# Altium PCB LCC Resonant Charging Board.PcbDoc
Units mm, origin at the board's own origin, x right, y up, seen from the top; angles counter-clockwise.
Board outline 100.23 x 48.06 mm, 2 copper layers (Top Layer, Bottom Layer); 29 components, 9 nets, 72 pads, 0 vias.
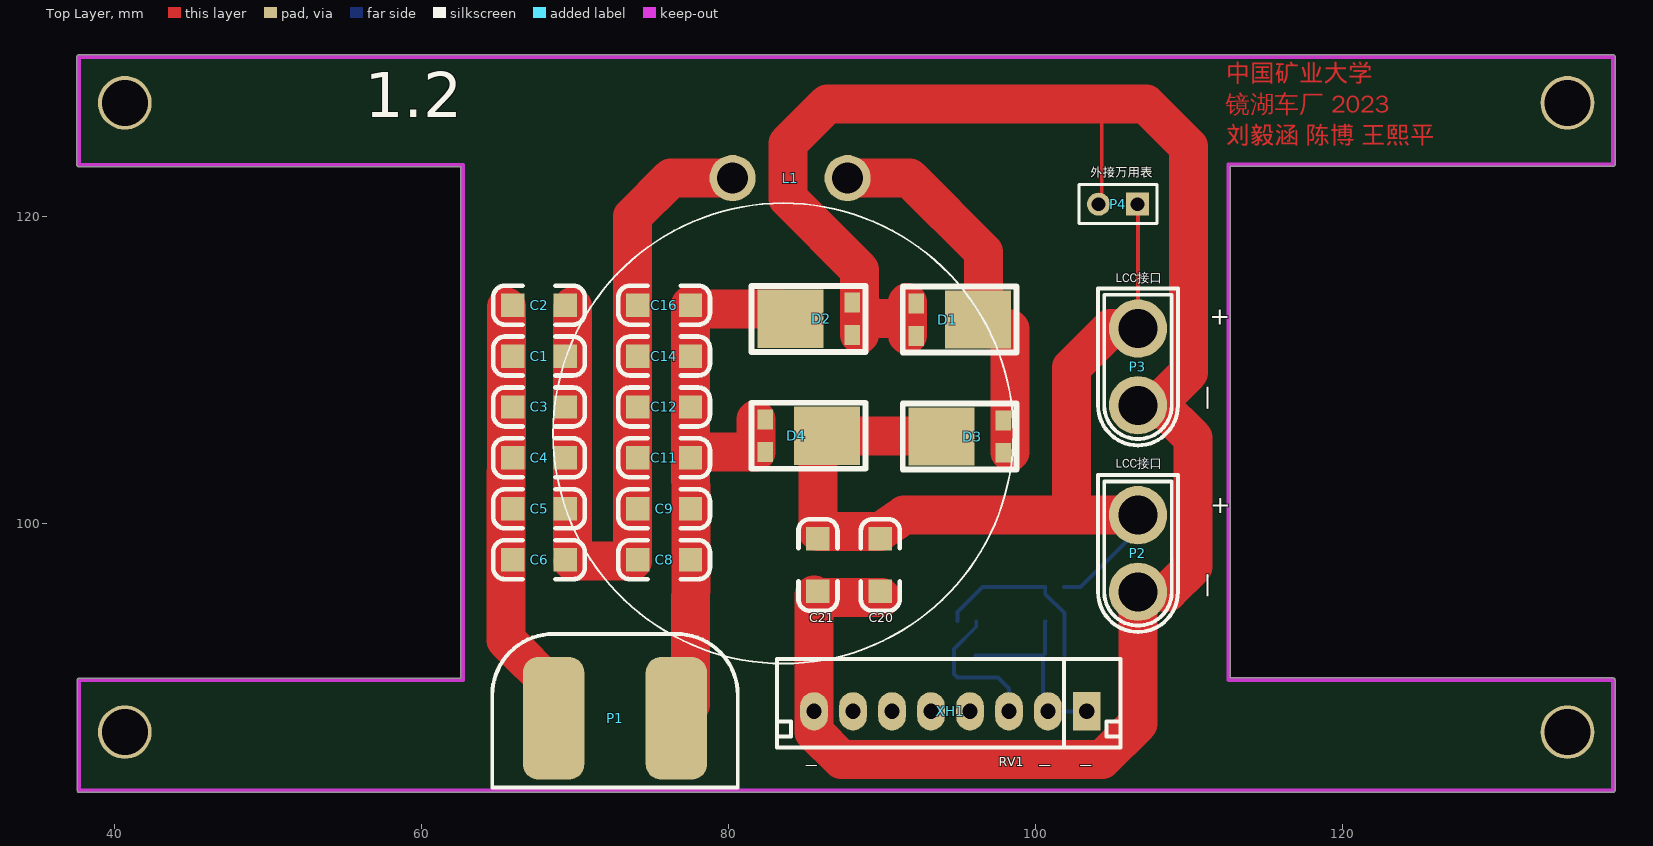
[diagram p0: Top Layer view]
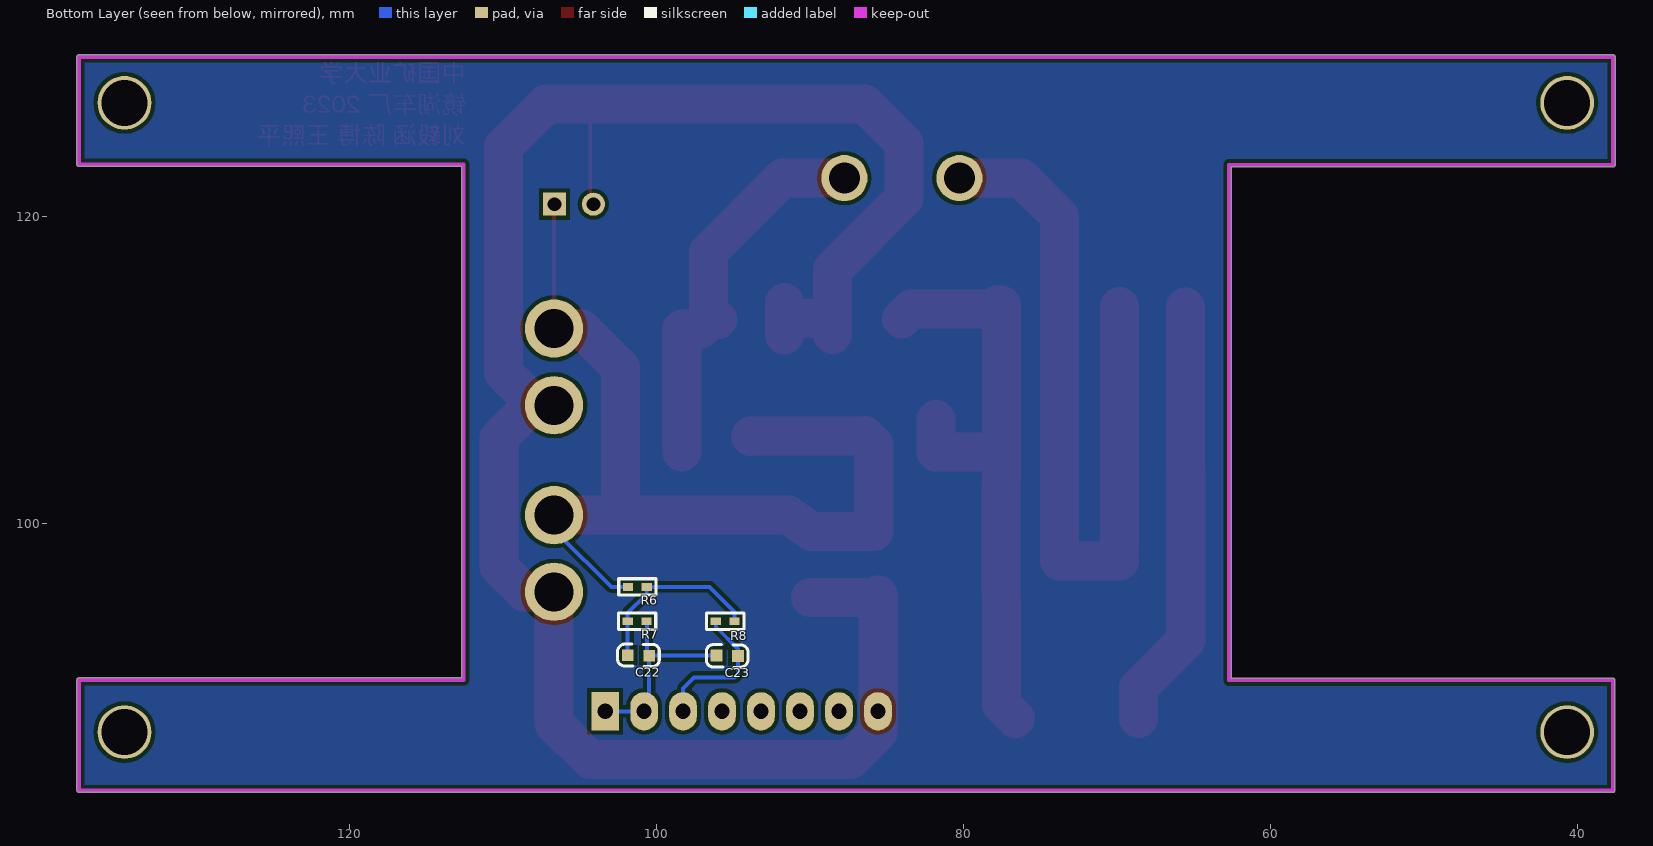
[diagram p1: Bottom Layer view, seen from below]
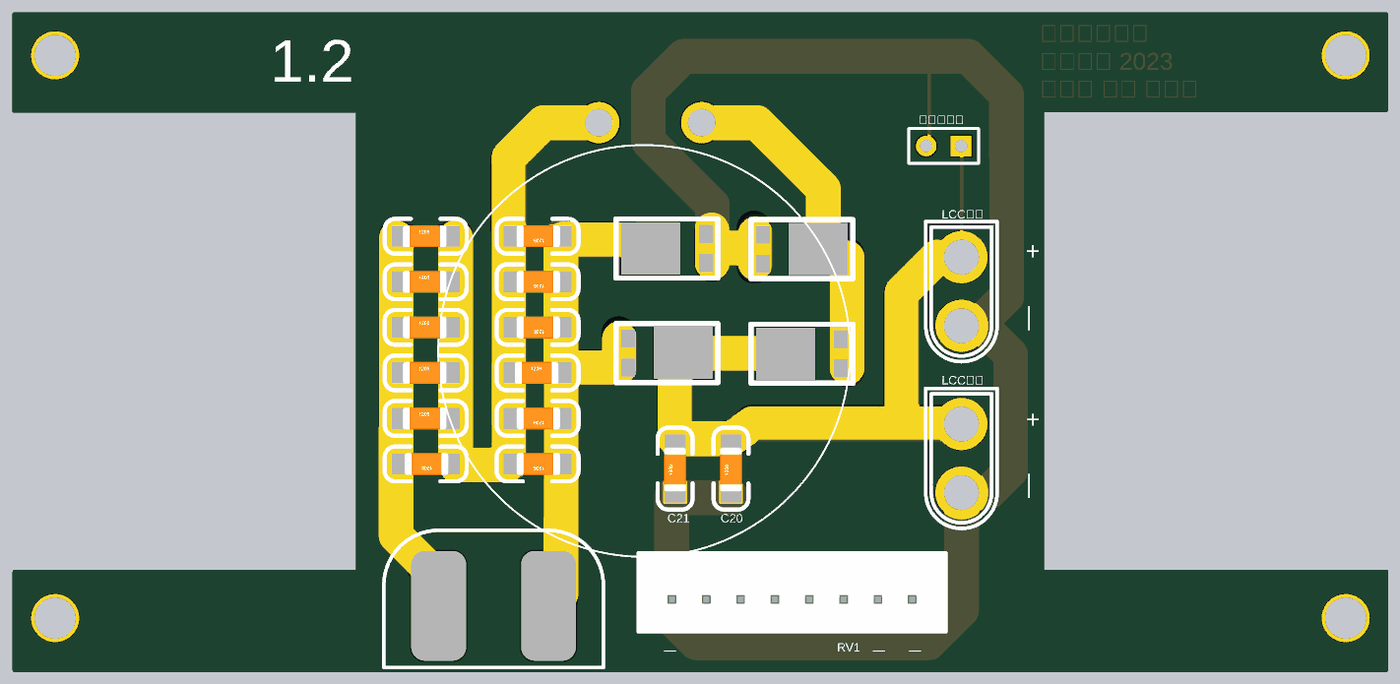
[diagram p2: 3D render of the assembled board from above, using the file's embedded part models]
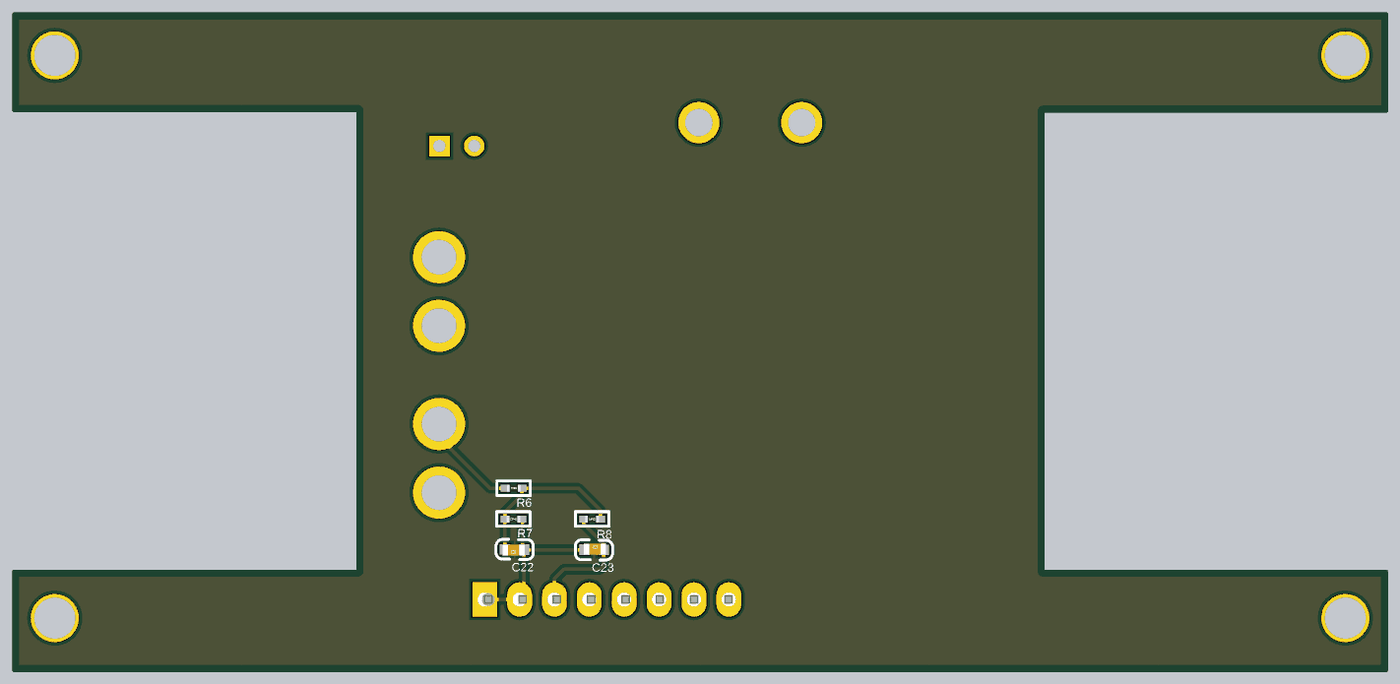
[diagram p3: 3D render of the assembled board from below, using the file's embedded part models]

## Layer stack, top to bottom
Top Solder: solder mask 0.0102, Solder Resist, Dk 3.5
Top Layer: signal copper 0.0356
Dielectric1: dielectric 0.32, FR-4, Dk 4.8
Bottom Layer: signal copper 0.0356
Bottom Solder: solder mask 0.0102, Solder Resist, Dk 3.5

## Board outline
37.719,82.499 cw(c37.719,82.626) 37.592,82.626 37.592,89.814 cw(c37.719,89.814) 37.719,89.942 62.585,89.942 62.585,123.266 37.694,123.266 cw(c37.694,123.393) 37.566,123.393 37.566,130.429 cw(c37.694,130.429) 37.694,130.556 137.668,130.556 cw(c137.668,130.429) 137.758,130.519 cw(c137.668,130.429) 137.795,130.429 137.795,123.429 cw(c137.668,123.429) 137.668,123.302 112.726,123.302 112.726,89.957 137.662,89.957 cw(c137.662,89.829) 137.789,89.829 137.789,82.626 cw(c137.662,82.626) 137.662,82.499

## Design rules (kind name [scope] priority, off if disabled: settings)
Clearance poly [(InPolygon)] p1: gap=0.254 ignorepadtopadclearanceinfootprint=FALSE except(0: Arc-Hole Track-Hole SMDPad-Hole THPad-Hole Via-Hole Fill-Hole Poly-Hole Region-Hole Text-Hole)
Clearance [All] p2: gap=0.127 ignorepadtopadclearanceinfootprint=FALSE except(0: Arc-Hole Track-Hole SMDPad-Hole THPad-Hole Via-Hole Fill-Hole Poly-Hole Region-Hole Text-Hole)
FabricationTestPointUsage TestPointUsage [All] p1: valid=0 allowmultiple=FALSE
FabricationTestpoint Testpoint [All] p1: side=3 testpointundercomponent=TRUE minsize=1.016 maxsize=2.54 preferedsize=1.524 minholesize=0 maxholesize=1.016 preferedholesize=0.813 testpointgrid=0.025 allowsidetop=TRUE allowsidebottom=TRUE usegrid=TRUE gridtolerance=0
HoleSize [All] p1: absolutevalues=TRUE maxlimit=25.4 minlimit=0.025 maxpercent=80.000 minpercent=20.000
MinimumSolderMaskSliver [All] p1: minsoldermaskwidth=0.025
PolygonConnect [All] p1: connectstyle=Direct reliefconductorwidth=0.254 reliefentries=4 polygonreliefangle="90 Angle" airgapwidth=0.254
RoutingVias [All] p1: holewidth=0.711 width=1.27 viastyle="Through Hole" minholewidth=0.559 minwidth=0.305 maxholewidth=0.711 maxwidth=1.27
SilkToSilkClearance [All] p1: silktosilkclearance=0.15
SilkToSolderMaskClearance SilkscreenOverComponentPads [IsPad] p1: minsilkscreentomaskgap=0 clearancetoexposedcopper=TRUE
SolderMaskExpansion [All] p1: expansion=0.102
Width [All] p1: maxlimit=2.54 minlimit=0.152 preferedwidth=0.254 minimp=50.000000 maximp=50.000000 favimp=50.000000
24 further rules are at their usual default settings.

## Classes and differential pairs
component class LCC充电板1.0: C1 C2 C3 C4 C6 C8 C9 C11 C12 C14 C16 C20 C21 C22 C23 D1 D2 D3 D4 P1 P2 P3 P4 R6 R7 R8

## Components (designator, comment, footprint, x,y, rotation, side; value= is the part's Value field where it differs from the comment)
C1 "" 1206C 65.964,110.931 r0 top
C2 "" 1206C 65.964,114.249 r0 top
C3 "" 1206C 65.964,107.614 r0 top
C4 "" 1206C 65.964,104.296 r0 top
C5 "" 1206C 65.964,100.978 r0 top
C6 "" 1206C 69.393,97.661 r180 top
C8 "" 1206C 77.546,97.661 r180 top
C9 "" 1206C 77.546,100.978 r180 top
C11 "" 1206C 74.117,104.296 r0 top
C12 "" 1206C 77.546,107.614 r180 top
C14 "" 1206C 77.546,110.931 r180 top
C16 "" 1206C 77.546,114.249 r180 top
C20 "100nf 250V" 1206C 89.917,95.606 r90 top
C21 "100nf 250V" 1206C 85.852,95.606 r90 top
C22 "10uF" 0603C 100.502,91.404 r0 bottom
C23 "10uF" 0603C 96.119,91.424 r180 bottom
D1 "ST2045" FM10U100 94.221,113.309 r180 top
D2 "ST2045" FM10U100 86.119,113.36 r0 top
D3 "ST2045" FM10U100 95.961,105.689 r0 top
D4 "ST2045" FM10U100 84.379,105.74 r180 top
L1 "电感" lcc电感 83.591,105.893 r270 top
P1 "线圈" 线圈接口 64.631,82.825 r0 top
P2 "LCC接口" XT30U-M 106.705,98.069 r270 top
P3 "LCC接口" XT30U-M 106.705,110.225 r270 top
P4 "外接万用表" HDR1X2 106.68,120.828 r180 top
R6 "39k" 0402R 100.66,95.885 r0 bottom
R7 "2.4k" 0402R 100.686,93.65 r0 bottom
R8 "10k" 0402R 96.164,93.65 r180 bottom
XH1 "XH8" XH8/2.54mm/180 103.378,87.782 r180 top

## Footprints (in the part's own frame and the unit in brackets; to place one, negate y for a bottom-side part, rotate by r counter-clockwise, add the part's x,y. Pads: shape width x height; smd on the part's side, far side on the other; paste and mask are expansions set on the pad)
0402R [mil]
  rect 26x20 smd: 1(0,0) 2(48,0)
  silkscreen extent -24,-21 72,21, body extent 4,-10 43,10, height 13
0603C [mil]
  rect 30x30 smd: 1(0.21,-0.35) 2(55.21,-1.35)
  silkscreen extent -26,-30 81,28, body extent -1,-15 62,16, height 12
1206C [mil]
  rect 60x60 smd: 1(0,0) 2(135,0)
  silkscreen extent -50,-50 185,50, body extent 2,-31 128,32, height 39
FM10U100 [mm]
  rect 1x1.3 smd mask+0.051: 1(1.958,1.057) 3(1.958,-1.057)
  rect 4.3x3.8 smd mask+0.051: 2(-2.057,0)
  silkscreen extent -4.58,-2.15 2.84,2.15
HDR1X2 [mm] "Connector; Header; 2 Position"
  rect 1.5x1.5 hole 0.9: 1(0,0)
  round 1.5 hole 0.9: 2(2.54,0)
  silkscreen extent -1.27,-1.27 3.81,1.27
lcc电感 [mm]
  round 3 hole 2: 0(-16.637,4.191) 1(-16.637,-3.302)
  silkscreen extent -15,-15 15,15
XH8/2.54mm/180 [mm]
  rect 1.8x2.5 hole 1: 1(0,0)
  oval 1.8x2.5 hole 1: 2(2.54,0) 3(5.08,0) 4(7.62,0) 5(10.16,0) 6(12.7,0) 7(15.24,0) 8(17.78,0)
  silkscreen extent -2.2,-3.4 20.2,2.35, body extent -2.2,-3.4 20.2,2.35, height 7
XT30U-M [mm]
  round 3.8 hole 2.54 mask+0.05: 1(-2.5,0) 2(2.5,0)
  silkscreen extent -5.1,-2.6 5.11,2.6
线圈接口 [mm]
  rrect50% 4x8 smd mask+0.102: 1(4,4.5) 2(12,4.5)
  silkscreen extent 0,0 16,10

## Part data
C1 C2 C3 C4 C5 C6 C8 C9 C11 C12 C14 C16 C20 C21 C22 C23: library part CAP, "无极性电容"
P1 P2 P3 P4: library part "Header 2", "Header, 2-Pin", LatestRevisionDate=17-Jul-2002, LatestRevisionNote="Re-released for DXP Platform.", Publisher="Altium Limited"
R6 R7 R8: library part RES

## Free pads (board coordinates)
  round 3.5 hole 3 mask+0.05: 2(40.694,86.429) 2(40.694,127.429) 2(134.694,86.429) 2(134.694,127.429)

## Nets (pads, with @x,y where several pads share a name; then routed paths per layer and width w, separated by ;. In a path a pad name is that pad's centre, name@x,y a point inside that pad or via, vN(x,y) a via of type N, cw(c..) or ccw(c..) an arc to the next point about the centre after c; other vN are vias at no path point)
AGND: C22.1 C23.1 R7.1 XH1.1 XH1.2 | length 13
  Bottom Layer w0.254: C23.1 96.115,91.413 C22.1 ; R7.1 100.635,93.65 100.635,91.54 C22.1 ; XH1.1 XH1.2 100.508,88.113 C22.1
NetC1_2: C1.2 C2.2 C3.2 C4.2 C5.2 C6.1 C8.2 C9.2 C11.1 C12.2 C14.2 C16.2 L1.1 | length 50.1
  Top Layer w2.54: C2.2@69.85,114.148 69.85,110.931 69.85,104.296 69.85,98.584 69.886,98.154 69.877,97.651 69.875,97.587 73.762,97.587 73.762,97.661 73.762,110.931 C16.2@73.762,114.3 ; C16.2@73.762,114.605 73.762,120.015 76.276,122.53 L1.1
NetC22_2: C22.2 R6.1 R7.2 R8.2 | length 12
  Bottom Layer w0.254: R8.2 94.945,94.259 96.571,95.885 R6.1 100.66,95.428 101.905,94.183 R7.2 C22.2
NetD1_2: D1.2 D3.1 D3.3 L1.0 | length 26.1
  Top Layer w2.54: L1.0 91.821,122.53 96.647,117.704 96.647,113.928 96.028,113.309 D1.2 96.528,113.309 97.158,112.679 98.374,112.679 D3.3@98.374,104.673
PGND: C20.1 C21.1 D1.1 D1.3 D2.1 D2.3 P2.2 P3.2 P4.2 XH1.8 | length 135.5
  Top Layer w0.254: P4.2 104.343,121.031 104.343,127.356
  Top Layer w2.54: D2.3@88.56,112.329 D2.1@88.56,114.442 ; C20.1@89.993,95.199 85.928,95.199 85.711,95.3 85.598,95.352 XH1.8 85.598,86.436 87.402,84.633 104.354,84.633 106.705,86.984 P2.2 108.65,95.569 110.287,97.206 110.287,105.588 108.149,107.725 P3.2@107.878,107.725 ; 91.703,112.304 91.703,114.417 91.282,113.386 89.109,113.386 D2.1@88.56,114.442 ; P3.2 P3.2@107.878,107.725 ; D2.1@88.56,114.442 88.56,116.545 83.896,121.209 83.896,124.79 86.462,127.356 104.343,127.356 107.213,127.356 109.982,124.587 109.982,120.142 110.002,120.122 110.002,109.85 P3.2@107.878,107.725
Rv1: C23.2 R8.1 XH1.3 | length 9.5
  Bottom Layer w0.254: R8.1 96.164,93.294 94.717,91.846 C23.2 94.717,90.221 94.945,89.992 97.587,89.992 98.298,89.281 XH1.3
V_AC+: C1.1 C2.1 C3.1 C4.1 C5.1 C6.2 P1.1 | length 28.1
  Top Layer w2.54: C2.1@65.557,114.122 65.557,109.458 65.532,97.661 65.532,92.424 68.631,89.325 P1.1
V_AC-: C8.1 C9.1 C11.2 C12.1 C14.1 C16.1 D2.2 D4.1 D4.3 P1.2 | length 40.7
  Top Layer w2.54: P1.2 77.546,88.241 77.546,93.269 77.572,97.66 C9.1@77.572,100.978 ; C9.1@77.572,100.979 C11.2 ; 81.811,106.797 81.811,104.684 77.934,104.684 C11.2 ; D2.2 83.432,113.99 78.102,113.99 77.843,114.249 C16.1 C14.1 C12.1 C11.2
VIN: C20.2 C21.2 D3.2 D4.2 P2.1 P3.1 P4.1 R6.2 | length 65.6
  Top Layer w0.254: P4.1 106.705,120.802 P3.1
  Top Layer w2.54: D3.2 93.878,105.715 86.462,105.715 D4.2 85.852,105.156 85.852,99.492 89.917,99.492 91.473,100.584 102.387,100.584 102.387,110.185 104.927,112.725 P3.1 ; 102.387,100.569 P2.1
  Bottom Layer w0.254: R6.2 102.972,95.885 106.37,99.283 106.37,100.233 P2.1
pads on no net: XH1.4 XH1.5 XH1.6 XH1.7

## Polygon pours and split planes (outlines as drawn)
PGND on Top Layer "Top Layer-PGND" (solid, remove dead copper, pour order 0): 237.694,123.393 237.694,130.429 337.668,130.429 337.668,123.429 312.598,123.429 312.598,89.829 337.662,89.829 337.662,82.626 237.719,82.626 237.719,89.814 262.713,89.814 262.713,123.393
no net on Bottom Layer (solid, pour order 6): 137.668,130.429 137.668,123.429 112.598,123.429 112.598,89.829 137.662,89.829 137.662,82.626 37.719,82.626 37.719,89.814 62.713,89.814 62.713,123.393 37.694,123.393 37.694,130.429
PGND on Bottom Layer "Bottom Layer-PGND" (solid, remove dead copper, pour order 2): 237.694,130.429 337.668,130.429 337.668,123.429 312.598,123.429 312.598,89.829 337.662,89.829 337.662,82.626 237.719,82.626 237.719,89.814 262.713,89.814 262.713,123.393 237.694,123.393

## Keep-outs
Keep-Out Layer:
  lines w0.254: 137.662,88.447 137.662,89.829 ; 137.668,124.638 137.668,123.429 ; 137.662,89.829 112.598,89.829 112.598,123.429 137.668,123.429 ; 137.662,89.829 137.662,82.626 37.719,82.626 37.719,89.814 62.713,89.814 62.713,123.393 37.694,123.393 37.694,130.429 137.668,130.429 137.668,123.429

## Other copper
Top Layer:
  text "中国矿业大学" at 112.42,128.422 h2
  text "镜湖车厂 2023" at 112.422,126.387 h2
  text "刘毅涵 陈博 王熙平" at 112.42,124.358 h2

## Silkscreen, mask and mechanical layers (free items; w line width, h text height)
Top Overlay:
  text "1.2" at 56.337,125.501 h5
  text "+" at 111.379,112.573 h2
  text "—" at 112.073,107.391 h2 r90
  text "+" at 111.404,100.305 h2
  text "—" at 112.073,95.174 h2 r90
  text "RV1" at 97.638,83.998 h1
  text "—" at 85.039,83.798 h1
  text "—" at 100.254,83.798 h1
  text "—" at 102.895,83.798 h1
Top Solder:
  lines w2.54: 65.532,114.275 65.532,92.456 67.564,90.424 67.564,90.145 ; 69.85,114.351 69.85,97.561 73.584,97.561 73.812,97.79 ; 73.698,97.676 73.698,114.389 ; 73.812,114.681 73.66,114.833 73.66,119.913 76.276,122.53 80.289,122.53 ; 77.521,87.732 77.521,113.843 77.724,114.046 82.906,114.046 ; 78.588,104.724 81.686,104.724 81.737,104.673 81.737,107.163 ; 85.776,104.496 85.776,99.619 85.903,99.492 90.094,99.492 ; 87.782,122.53 91.796,122.53 96.647,117.678 96.647,115.24 ; 87.859,105.74 92.532,105.74 ; 88.519,112.192 88.519,114.706 ; 89.078,113.411 90.907,113.411 ; 89.738,99.593 90.297,99.593 91.415,100.711 106.492,100.711 106.669,100.533 ; 91.592,112.065 91.592,114.859 ; 98.4,104.521 98.4,112.878 ; 102.286,100.965 102.286,110.084 104.927,112.725